# Altium PCB 滤波器.PcbDoc
Units mil, origin at the board's own origin, x right, y up, seen from the top; angles counter-clockwise.
Board outline 6000 x 4000 mil, 2 copper layers (Top Layer, Bottom Layer); 58 components, 33 nets, 221 pads, 0 vias.
Unrouted connection lines stored in the file: 12.
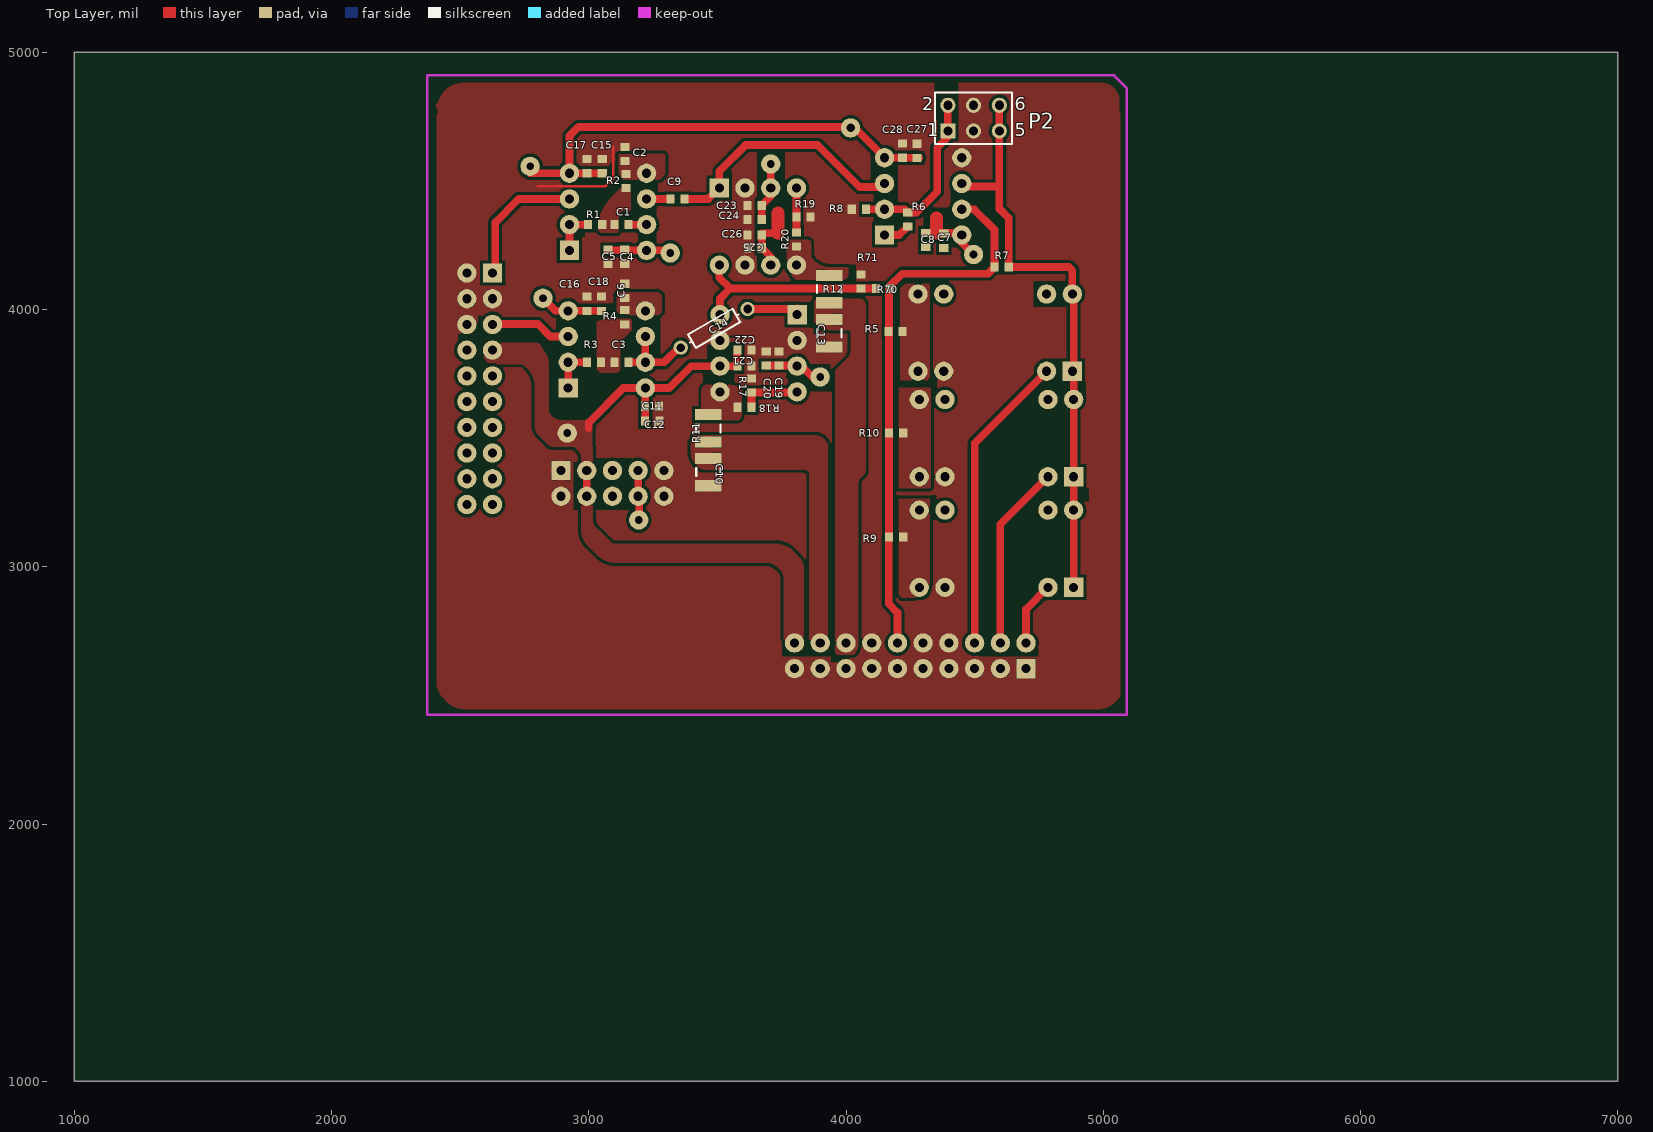
[diagram p0: Top Layer view]
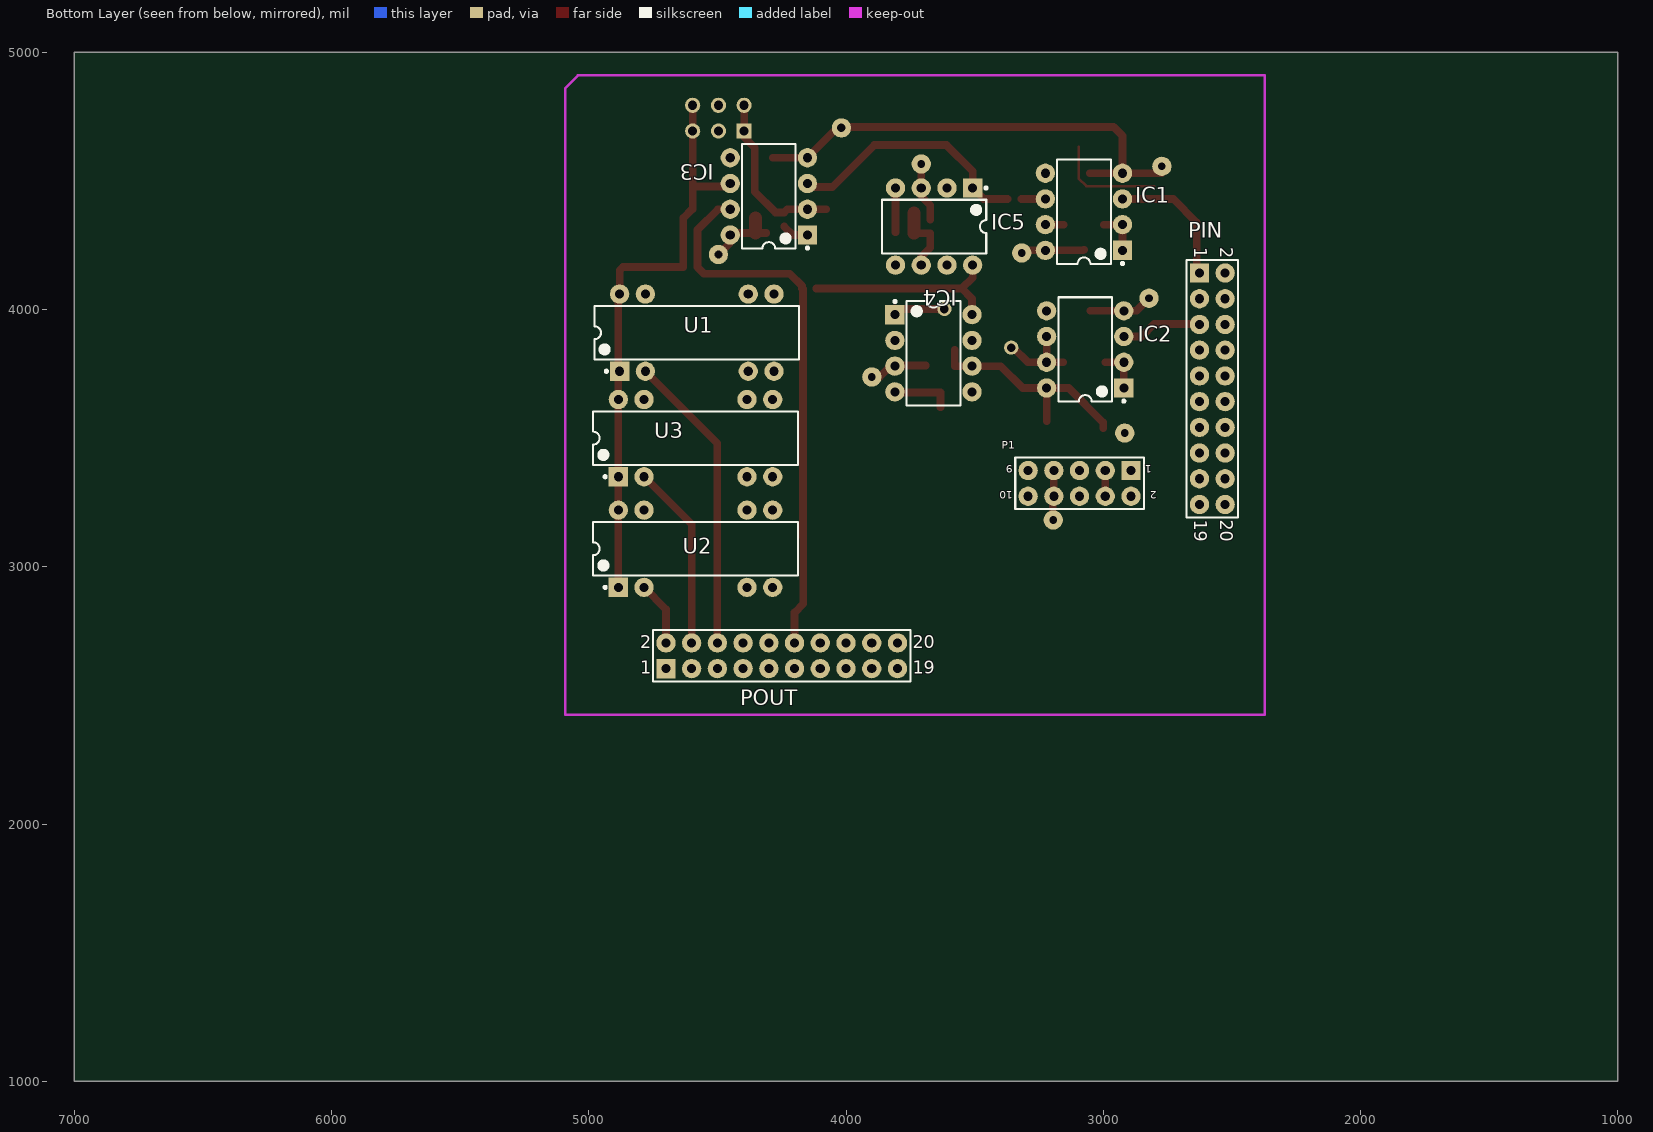
[diagram p1: Bottom Layer view, seen from below]

## Layer stack, top to bottom
Top Solder: solder mask 0.4, Solder Resist, Dk 3.5
Top Layer: signal copper 1.4
Dielectric 1: dielectric 12.6, FR-4, Dk 4.8
Bottom Layer: signal copper 1.4
Bottom Solder: solder mask 0.4, Solder Resist, Dk 3.5

## Board outline
1000,1000 7000,1000 7000,5000 1000,5000

## Design rules (kind name [scope] priority, off if disabled: settings)
Clearance [All] p1: gap=5 ignorepadtopadclearanceinfootprint=FALSE except(0: Arc-Hole Track-Hole SMDPad-Hole THPad-Hole Via-Hole Fill-Hole Poly-Hole Region-Hole Text-Hole; 13: Arc-Fill Arc-Poly Arc-Region Track-Fill Track-Poly Track-Region SMDPad-Fill SMDPad-Poly SMDPad-Region THPad-Fill THPad-Poly THPad-Region Via-Fill Via-Poly Via-Region Fill-Fill Fill-Poly Fill-Region Poly-Poly Poly-Region Region-Region)
PolygonConnect [All] p1: connectstyle=Relief reliefconductorwidth=30 reliefentries=4 polygonreliefangle="90 Angle" airgapwidth=0
RoomDefinition 滤波器 [InComponentClass('滤波器')] p1: confinementstyle=ConfineIn formatcopy=TRUE outline 115,55 12935,55 12935,5840 115,5840
RoutingVias [All] p1: holewidth=28 width=50 viastyle="Through Hole" minholewidth=28 minwidth=50 maxholewidth=28 maxwidth=50
SolderMaskExpansion [All] p1: expansion=4
Width [All] p1: maxlimit=30 minlimit=10 preferedwidth=30 minimp=50.000000 maximp=50.000000 favimp=50.000000
30 further rules are at their usual default settings.

## Components (designator, comment, footprint, x,y, rotation, side; value= is the part's Value field where it differs from the comment)
C1 "Cap" 1608[0603] 3127.28,4330 r0 top value=10n
C2 "Cap" 1608[0603] 3141.25,4605 r270 top value=10n
C3 "Cap" 1608[0603] 3127.56,3795 r0 top value=10n
C4 "Cap" 1608[0603] 3140,4205 r270 top value=10nF
C5 "Cap" 1608[0603] 3075,4205 r270 top value=10uF
C6 "Cap" 1608[0603] 3140,4072.56 r270 top value=10n
C7 "Cap" 1608[0603] 4380,4267.44 r270 top value=10nF
C8 "Cap" 1608[0603] 4310,4270 r270 top value=10uF
C9 "Cap" 1608[0603] 3345,4430 r180 top value=1uF
C10 "Cap" C1210 3465.12,3368 r270 top value=1uF
C11 "Cap" 1608[0603] 3246,3624 r0 top value=10nF
C12 "Cap" 1608[0603] 3246.75,3566 r0 top value=10uF
C13 "Cap" C1210 3935,3908 r270 top value=1uF
C14 "Cap" AXIAL-0.3 3487.59,3926.96 r210 top value=1uF
C15 "Cap" 1608[0603] 3052.44,4557.44 r90 top value=10nF
C16 "Cap" 1608[0603] 2992.44,4022.44 r90 top value=10nF
C17 "Cap" 1608[0603] 2992.44,4557.44 r90 top value=10uF
C18 "Cap" 1608[0603] 3050,4022.44 r90 top value=10uF
C19 "Cap" 1608[0603] 3740,3809.84 r90 top value=10nF
C20 "Cap" 1608[0603] 3690,3809.84 r90 top value=10uF
C21 "Cap" 1608[0603] 3605,3780 r0 top value=10nF
C22 "Cap" 1608[0603] 3605,3843.31 r0 top value=10uF
C23 "Cap" 1608[0603] 3645,4405 r180 top value=10nF
C24 "Cap" 1608[0603] 3645,4350 r180 top value=10uF
C25 "Cap" 1608[0603] 3645,4240 r180 top value=10nF
C26 "Cap" 1608[0603] 3645,4290 r180 top value=10uF
C27 "Cap" 1608[0603] 4276,4616.95 r90 top value=10nF
C28 "Cap" 1608[0603] 4220,4617.44 r90 top value=10uF
IC1 "OPA2188AID" dip-8 3075,4380 r0 bottom
IC2 "OPA2188AID" dip-8 3070,3845 r0 bottom
IC3 "OPA2188AID" dip-8 4300,4440 r0 bottom
IC4 "AD835ARZ" DIP-8 3660,3830 r180 bottom
IC5 "AD835ARZ" DIP-8 3657.56,4322.44 r270 bottom
P1 "Header 5X2" HDR2X5 2892,3374 r0 bottom
P2 "Header 3X2" HDR2X3 4396,4694 r0 top
PIN "Header 10X2" HDR2X10 2626,4142 r270 bottom
POUT "Header 10X2" HDR2X10 4700,2604 r180 bottom
R1 "Res1" 1608[0603] 3024.88,4330 r0 top value=120
R2 "Res1" 1608[0603] 3145,4500 r90 top value=120
R3 "Res1" 1608[0603] 3020,3795 r0 top value=120
R4 "Res1" 1608[0603] 3140,3970 r90 top value=120
R5 "Res1" 1608[0603] 4192.56,3915 r180 top value=70
R6 "Res1" 1608[0603] 4240,4350 r270 top value=45K
R7 "Res1" 1608[0603] 4605,4165 r180 top value=500
R8 "Res1" 1608[0603] 4050,4390 r0 top value=10K
R9 "Res1" 1608[0603] 4195,3115 r180 top value=1
R10 "Res1" 1608[0603] 4195,3520 r180 top value=7
R11 "Res1" C1210 3465.12,3538.15 r270 top value=10K
R12 "Res1" C1210 3935,4079.41 r270 top value=10K
R17 "Res1" 1608[0603] 3632.44,3705 r270 top value=200
R18 "Res1" 1608[0603] 3605,3620 r180 top value=2K
R19 "Res1" 1608[0603] 3835,4360 r180 top value=200
R20 "Res1" 1608[0603] 3807.56,4272.44 r270 top value=2K
R70 "Res1" 1608[0603] 4143.56,4082 r0 top value=80K
R71 "Res1" 1608[0603] 4058,4108.81 r90 top value=20K
U1 "D1A050000" D1A050000 4880,3760 r90 bottom
U2 "D1A050000" D1A050000 4885,2920 r90 bottom
U3 "D1A050000" D1A050000 4885,3350 r90 bottom

## Footprints (in the part's own frame and the unit in brackets; to place one, negate y for a bottom-side part, rotate by r counter-clockwise, add the part's x,y. Pads: shape width x height; smd on the part's side, far side on the other; paste and mask are expansions set on the pad)
1608[0603] [mm] "Chip Capacitor, Body 1.6x0.8mm, IPC High Density"
  rect 0.8x0.9 smd: 1(-0.7,0) 2(0.7,0)
  body extent -0.87,-0.48 0.87,0.48, height 1.3
AXIAL-0.3 [mm] "Axial Device, Thru-Hole; 2 Leads; 0.3 in Pin Spacing"
  round 1.4 hole 0.85: 1(-3.81,0) 2(3.81,0)
  silkscreen extent -2.77,-0.76 2.77,0.76
C1210 [mm] "Chip Capacitor, Body 3.2x2.5mm, IPC High Density"
  rect 1.1x2.6 smd: 1(-1.35,0) 2(1.35,0)
  silkscreen extent -0.4,-1.2 0.4,1.2, body extent -1.7,-1.35 1.7,1.35, height 1.3
D1A050000 [mm]
  rect 1.905x1.905 hole 0.9: 1(0,0)
  round 1.905 hole 0.9: 2(0,-2.54) 6(0,-12.7) 7(0,-15.24) 8(7.62,-15.24) 9(7.62,-12.7) 13(7.62,-2.54) 14(7.62,0)
  silkscreen extent -0.12,-17.72 6.46,2.48, body extent 0.21,-17.72 7.41,2.48, height 5.08
dip-8 [mm] "DIP; 8 Leads; Row Spacing 7.62 mm; Pitch 2.54 mm"
  rect 1.905x1.905 hole 0.9: 1(-3.81,3.81)
  round 1.905 hole 0.9: 2(-3.81,1.27) 3(-3.81,-1.27) 4(-3.81,-3.81) 5(3.81,-3.81) 6(3.81,-1.27) 7(3.81,1.27) 8(3.81,3.81)
  silkscreen extent -3.93,-5.15 2.65,5.23, body extent -3.6,-5.15 3.6,5.15, height 5.08
DIP-8 [mm] "DIP; 8 Leads; Row Spacing 7.62 mm; Pitch 2.54 mm"
  rect 1.905x1.905 hole 0.9: 1(-3.81,3.81)
  round 1.905 hole 0.9: 2(-3.81,1.27) 3(-3.81,-1.27) 4(-3.81,-3.81) 5(3.81,-3.81) 6(3.81,-1.27) 7(3.81,1.27) 8(3.81,3.81)
  silkscreen extent -3.94,-5.15 2.65,5.23, body extent -3.6,-5.15 3.6,5.15, height 5.08
HDR2X3 [mm] "Connector; Header; 3x2 Position"
  rect 1.5x1.5 hole 0.9: 1(0,0)
  round 1.5 hole 0.9: 2(0,2.54) 3(2.54,0) 4(2.54,2.54) 5(5.08,0) 6(5.08,2.54)
  silkscreen extent -1.27,-1.27 6.35,3.81
HDR2X5 [mm] "Connector; Header; 5x2 Position"
  rect 1.905x1.905 hole 0.9: 1(0,0)
  round 1.905 hole 0.9: 2(0,2.54) 3(2.54,0) 4(2.54,2.54) 5(5.08,0) 6(5.08,2.54) 7(7.62,0) 8(7.62,2.54) 9(10.16,0) 10(10.16,2.54)
  silkscreen extent -1.27,-1.27 11.43,3.81
HDR2X10 [mm] "Connector; Header; 10x2 Position"
  rect 1.905x1.905 hole 0.9: 1(0,0)
  round 1.905 hole 0.9: 2(0,2.54) 3(2.54,0) 4(2.54,2.54) 5(5.08,0) 6(5.08,2.54) 7(7.62,0) 8(7.62,2.54) 9(10.16,0) 10(10.16,2.54) 11(12.7,0) 12(12.7,2.54) 13(15.24,0) 14(15.24,2.54) 15(17.78,0) 16(17.78,2.54) 17(20.32,0) 18(20.32,2.54) 19(22.86,0) 20(22.86,2.54)
  silkscreen extent -1.27,-1.27 24.13,3.81

## Part data
C1 C2 C3 C4 C5 C6 C7 C8 C9 C10 C11 C12 C13 C14 C15 C16 C17 C18 C19 C20 C21 C22 C23 C24 C25 C26 C27 C28: "Capacitor", LatestRevisionDate=17-Jul-2002, LatestRevisionNote="Re-released for DXP Platform.", PackageDescription="Radial Cap, Thru-Hole; 2 Leads; 0.3 in Pin Spacing", PackageReference=RAD-0.3, Published=8-Jun-2000, Publisher="Altium Limited"
IC1 IC2 IC3: "Integrated Circuit", Manufacturer_Name="Texas Instruments", Mouser Part Number=595-OPA2188AID, RS Part Number=8122568P, Datasheet Link=http://www.ti.com/lit/ds/symlink/opa2188.pdf, Height=1.75mm, Manufacturer_Part_Number=OPA2188AID, Mouser Price/Stock=https://www.mouser.com/Search/Refine.aspx?Keyword=595-OPA2188AID, RS Price/Stock=http://uk.rs-online.com/web/p/products/8122568P
IC4 IC5: "Integrated Circuit", Manufacturer_Name="Analog Devices", Mouser Part Number=584-AD835ARZ, RS Part Number=5236973, Datasheet Link=http://www.analog.com/static/imported-files/data_sheets/AD835.pdf, Height=1.75mm, Manufacturer_Part_Number=AD835ARZ, Mouser Price/Stock=https://www.mouser.com/Search/Refine.aspx?Keyword=584-AD835ARZ, RS Price/Stock=https://uk.rs-online.com/web/p/products/5236973
P1: "Header, 5-Pin, Dual row", LatestRevisionDate=17-Jul-2002, LatestRevisionNote="Re-released for DXP Platform.", Publisher="Altium Limited"
P2: "Header, 3-Pin, Dual row", LatestRevisionDate=17-Jul-2002, LatestRevisionNote="Re-released for DXP Platform.", Publisher="Altium Limited"
PIN POUT: "Header, 10-Pin, Dual row", LatestRevisionDate=17-Jul-2002, LatestRevisionNote="Re-released for DXP Platform.", Publisher="Altium Limited"
R1 R2 R3 R4 R5 R6 R7 R8 R9 R10 R11 R12 R17 R18 R19 R20 R70 R71: "Resistor", LatestRevisionDate=17-Jul-2002, LatestRevisionNote="Re-released for DXP Platform.", PackageDescription="Axial Device, Thru-Hole; 2 Leads; 0.3 in Pin Spacing", PackageReference=AXIAL-0.3, Published=8-Jun-2000, Publisher="Altium Limited"

## Free pads (board coordinates)
  round 75 hole 30: 2(2772,4556.75) 3(2821.8,4044) 4(4496,4214) 5(3316.67,4220) 6(3707.56,4566.02) 7(3899.35,3738) 9(3194.21,3182) 10(2916.54,3519.67)
  round 75 hole 33.46: 11(4017.8,4706)

## Nets (pads, with @x,y where several pads share a name; then routed paths per layer and width w, separated by ;. In a path a pad name is that pad's centre, name@x,y a point inside that pad or via, vN(x,y) a via of type N, cw(c..) or ccw(c..) an arc to the next point about the centre after c; other vN are vias at no path point)
+5: C4.1 C5.1 C7.1 C8.1 C11.1 C12.1 C21.1 C22.1 C25.1 C26.1 IC1.8 IC2.8 IC3.8 IC4.6 IC5.6 P1.3 P1.4 pad.4 pad.5 pad.10 PIN.7 POUT.20 | length 1812.8
  Top Layer w30: P1.4 P1.3 ; 3000,3538.58 3000,3560.54 3134.46,3695 IC2.8 ; C5.1 3077.56,4230 IC1.8 3316.67,4230 pad.5 ; C12.1 3220,3566.81 IC2.8 ; C22.1 C21.1 IC4.6 3398,3780 3313,3695 IC2.8 ; IC5.6 3707.56,4205 C25.1 C26.1 3672.56,4296.32 3736,4296.32 ; C8.1 4352,4297.56 4442.44,4297.56 IC3.8 4450,4260 pad.4
  Top Layer w50: 3736,4296.32 3736,4375 ; 4352,4297.56 4352,4356
+IN1_A: IC1.3 PIN.1 | length 527.2
  Top Layer w30: PIN.1 2636,4152 2636,4338 2728,4430 IC1.3
+IN1_B: C2.2 IC1.5 R2.2
+IN2_A: IC2.3 PIN.5 | length 315.1
  Top Layer w30: PIN.5 2628,3944 2802,3944 2851,3895 IC2.3
+IN2_B: C6.2 IC2.5 R4.2
+IN3_A: C9.1 IC3.3 IC5.1 | length 975.6
  Top Layer w30: C9.1 3465.12,4430 IC5.1 3507.56,4537.42 3609.34,4639.2 3890.28,4639.2 4053.48,4476 4136,4476 IC3.3
+IN3_B: C2.1 C4.2 C5.2 C6.1 C10.2 C11.2 C12.2 C13.2 C15.2 C16.2 C17.2 C18.2 C19.2 C20.2 C21.2 C22.2 C23.2 C24.2 C25.2 C26.2 C27.2 C28.2 IC3.5 IC4.2 IC4.7 IC5.2 IC5.7 P1.1 P1.2 P1.9 P1.10 P2.3 P2.4 PIN.2 PIN.3 PIN.4 PIN.6 POUT.1 POUT.3 POUT.5 POUT.7 POUT.8 POUT.9 POUT.10 POUT.11 POUT.13 POUT.14 POUT.15 POUT.17 POUT.19 R8.1 R17.1 R19.1 R71.2 U1.6 U2.6 U3.6 | length 428.9
  Top Layer w10: 2801.37,4480 3065.82,4480 3096,4510.18 3096,4632
-5: C15.1 C16.1 C17.1 C18.1 C19.1 C20.1 C23.1 C24.1 C27.1 C28.1 IC1.4 IC2.4 IC3.4 IC4.3 IC5.3 P1.7 P1.8 pad.2 pad.3 pad.6 pad.7 pad.9 pad.11 | length 2781.3
  Top Layer w30: pad.2 2772,4530 IC1.4 ; pad.3 2870.8,3995 IC2.4 2920.12,3994.88 C16.1 C18.1 ; C15.1 3052.32,4530 IC1.4 ; P1.7 P1.8 3198,3274 pad.9 ; C24.1 C23.1 3707.56,4440 IC5.3 pad.6 ; C20.1 C19.1 3824.78,3782.28 3869.06,3738 pad.7 ; C27.1@4285,4589.88 4284.88,4590 IC3.4 4030,4710 2960,4710 2925,4675 IC1.4
-IN1_A: IC1.1 IC1.2 R1.1 | length 172.3
  Top Layer w30: IC1.1 IC1.2 R1.1
-IN1_B: C1.2 C9.2 IC1.6 IC1.7 | length 162.6
  Top Layer w30: C1.2 IC1.7 ; IC1.6 C9.2
-IN2_A: IC2.1 IC2.2 R3.1 | length 172.4
  Top Layer w30: IC2.1 IC2.2 R3.1
-IN2_B: C3.2 C14.2 IC2.6 IC2.7 | length 326.6
  Top Layer w30: C3.2 IC2.7 ; IC2.6 IC2.7 ; C14.2 3349.56,3851.96 3292.3,3794.71 3220,3794.71 IC2.7
-IN3_A: IC3.2 P2.1 P2.2 R6.1 R8.2 | length 668.6
  Top Layer w30: R8.2 4227.56,4390 R6.1 4274.09,4377.56 4354.53,4458 4354.53,4628.64 4396,4670.11 P2.1 P2.2
-IN3_B: IC3.6 P2.5 P2.6 R7.1 U1.1 U1.14 U2.1 U2.14 U3.1 U3.14 | length 2292.7
  Top Layer w30: IC3.6 4450,4478 4596,4478 ; P2.6 P2.5 4596,4478 ; U2.1 U2.14 U3.1 U3.14 4885,4060 U1.14 4880,4152 4867,4165 R7.1 4632.56,4355.46 4597.3,4390.72 4596,4390.72 4596,4478
NetC1_1: C1.1 R1.2 R2.1
NetC3_1: C3.1 R3.2 R4.1
NetC7_2: C7.2 C8.2
NetIC4_4: IC4.4 R17.2 R18.1 | length 237.6
  Top Layer w30: R18.1 3632.44,3620.12 R17.2 3810,3677.44 IC4.4
NetIC5_4: IC5.4 R19.2 R20.1 | length 172.5
  Top Layer w30: R20.1 3807.56,4359.88 R19.2 3807.44,4472.32 IC5.4
NetR5_1: R5.1 U1.7 U1.8
NetR9_1: R9.1 U2.7 U2.8
NetR10_1: R10.1 U3.7 U3.8
OUT1: IC4.5 R11.1 R18.2
OUT2: IC5.5 R12.1 R20.2
OUT3_A: IC3.1 R6.2 | length 103.4
  Top Layer w30: IC3.1 4207.56,4290 R6.2
OUT3_B: IC3.7 POUT.12 R5.2 R7.2 R9.2 R10.2 R70.2 | length 2146.9
  Top Layer w30: 3507.56,3982.44 3510,3980 ; R70.2@4167.44,4080 R10.2 R9.2 4166,3115 4166,2856 4200,2822 POUT.12 ; R70.2 4171.12,4091.8 4218.76,4139.44 4551.88,4139.44 R7.2 4577.44,4309.84 4497.28,4390 IC3.7
OUT33_B: IC4.8 IC5.8 R70.1 R71.1 | length 751.7
  Top Layer w30: IC5.8 3507.56,4124.08 3549.64,4082 ; 3510,4021 3510,4042.36 3549.64,4082 ; R70.1 3549.64,4082
PIN1: POUT.2 U2.2 | length 251.2
  Top Layer w30: POUT.2 4700,2835 U2.2
PIN7: POUT.4 U3.2 | length 722.6
  Top Layer w30: POUT.4 4600,3165 U3.2
PIN70: POUT.6 U1.2 | length 1172
  Top Layer w30: POUT.6 4500,3480 U1.2
VPIN1: C10.1 POUT.18 R11.2
VPIN2: C13.1 POUT.16 R12.2
X1: C14.1 IC4.1 | length 226.1
  Top Layer w30: C14.1 3788.04,4001.96 IC4.1 IC4.1@3810,4004.5
pads on no net: P1.5 P1.6 PIN.8 PIN.9 PIN.10 PIN.11 PIN.12 PIN.13 PIN.14 PIN.15 PIN.16 PIN.17 PIN.18 PIN.19 PIN.20 U1.9 U1.13 U2.9 U2.13 U3.9 U3.13

## Polygon pours and split planes (outlines as drawn)
+IN3_B on Top Layer (solid, pour order 72): 2413.41,4778 2413.41,4782 cw(c2513.41,4782) 2513.41,4882 4990.59,4882 cw(c4990.59,4810) 5062.59,4810 5062.59,4777.41 ccw(c5070,4777.41) 5070,4770 2420.22,4770 cw(c2420.22,4780.75) 2409.47,4780.75
+IN3_B on Top Layer (solid, remove dead copper, pour order 70): 2414.82,4766 2412,4764 ccw(c2409.59,4765) 2412,4766 2410,4766 2410,2550 ccw(c2496.91,2550) 2435.46,2488.54 2448.71,2475.29 ccw(c2519.42,2546) 2519.42,2446 4982,2446 ccw(c4982,2528.08) 5040.04,2470.04 5060,2490 ccw(c5045.52,2504.48) 5066,2504.49 5066,4751.23 ccw(c4977.24,4751.23) 5040,4814 ccw(c4972.4,4746.41) 4972.4,4842 2474,4842 ccw(c2473.99,4788.91) 2436.44,4826.44 2410,4800 ccw(c2419.65,4790.34) 2412,4779.04 2412,4765.36
VPIN2 on Top Layer (solid, pour order 58): 4018,3920 3942.67,3920 cw(c3942.67,4011.46) 3878,3946.79 cw(c3882.83,3951.62) 3876,3951.62 3876,4026.26 cw(c3897.1,4026.26) 3882.18,4041.18 3886,4045 ccw(c3893.24,4052.24) 3893.24,4042 4050.69,4042 cw(c4050.69,4014.69) 4070,4034 cw(c4055.52,4019.52) 4076,4019.51 4076,3374 cw(c4051.87,3374) 4068.93,3356.93 4054,3342 ccw(c4068.48,3327.52) 4048,3327.51 4048,2698.63 cw(c3993.39,2698.62) 4032,2660 cw(c4027.18,2664.8) 4027.17,2658 3972.49,2658 cw(c3972.48,2678.48) 3958,2664 3958,3764 4006,3812 ccw(c3977.03,3840.97) 4018,3840.97
+5 on Top Layer (solid, pour order 66): 2798.35,3870 2815.26,3853.08 cw(c2746.17,3784) 2843.87,3784 2843.87,3612.45 ccw(c2878.45,3612.45) 2854,3588 ccw(c2897.46,3631.46) 2897.46,3570 3004,3570 cw(c3004,3559.97) 3014.03,3559.95 3013.84,3450 3005.07,3450 cw(c3005.07,3510.91) 2962,3467.84 2948.99,3480.85 ccw(c2878.28,3410.15) 2878.28,3510.14 2843.87,3510.14 cw(c2843.87,3524.67) 2833.6,3514.4 2810,3538 cw(c2838.14,3566.14) 2798.35,3566.14
+5 on Top Layer (solid, pour order 64): 2584,3866 2584,3849.11 ccw(c2659.11,3849.11) 2606,3796 ccw(c2625.31,3815.31) 2625.31,3788 2736,3788 cw(c2736,3768.7) 2749.66,3782.34 2762,3770 cw(c2694.41,3702.4) 2790,3702.4 2790,3550 ccw(c2847.94,3550) 2806.97,3509.03 2842,3474 ccw(c2859.12,3491.12) 2859.12,3466.91 2934,3466.91 cw(c2934.01,3444.97) 2949.52,3460.48 2958,3452 cw(c2929.04,3423.03) 2970,3423.03 2970,3146 ccw(c3061.74,3146) 2996.87,3081.13 3032.71,3045.29 ccw(c3103.42,3116) 3103.42,3016 3686,3016 cw(c3686.01,2943.59) 3737.21,2994.79 3742,2990 cw(c3703.39,2951.38) 3758,2951.37 3758,2710.26 ccw(c3821.39,2710.26) 3776.57,2665.43 3778,2664 ccw(c3792.49,2678.49) 3792.49,2658 3824,2658 ccw(c3824,2672.49) 3834.24,2662.24 3836,2664 3836,2992 ccw(c3768.42,2992.01) 3816.2,3039.8 3795.29,3060.71 ccw(c3724.59,2990.02) 3724.58,3090 3099.72,3090 cw(c3099.72,3108.65) 3086.54,3095.46 3026,3156 cw(c3050.15,3180.14) 3016,3180.14 3016,3456 ccw(c2938.76,3456.01) 2993.37,3510.63 2975.29,3528.71 ccw(c2904.59,3458.02) 2904.58,3558 2850,3558 cw(c2850,3567.66) 2843.17,3560.83 cw(c2889.46,3607.11) 2824,3607.11 2824,3827.37 ccw(c2769.39,3827.38) 2808,3866 ccw(c2798.36,3856.38) 2798.34,3870 2582,3870
VPIN1 on Top Layer (solid, pour order 60): 3396,3449.94 ccw(c3477.94,3449.94) 3420,3392 ccw(c3453.8,3425.8) 3453.8,3378 3832,3378 cw(c3832,3345.76) 3854.8,3368.56 3855.35,3368 cw(c3848.97,3361.61) 3858,3361.61 3858,2718 ccw(c3919.97,2718) 3876.15,2674.18 3890,2660.33 3924,2660.33 ccw(c3924,2670.79) 3931.39,2663.39 3938,2670 cw(c3957.31,2689.31) 3930,2689.31 3930,3462.2 ccw(c3882.2,3462.2) 3916,3496 ccw(c3877.37,3457.37) 3877.37,3512 3406,3512 3406,3510.14 cw(c3371.86,3510.14) 3396,3486
OUT1 on Top Layer (solid, pour order 56): 3465.31,3570 cw(c3465.31,3597.31) 3446,3578 cw(c3465.31,3597.31) 3438,3597.31 3438,3682.69 cw(c3465.31,3682.69) 3446,3702 cw(c3460.49,3687.51) 3460.49,3708 3544.17,3708 cw(c3544.17,3634.71) 3596,3686.53 ccw(c3600.83,3681.7) 3594,3681.7 3594,3591.31 cw(c3566.69,3591.31) 3586,3572 cw(c3581.17,3576.83) 3581.17,3570
OUT2 on Top Layer (solid, pour order 52): 3770,4256 3770,4191.42 ccw(c3870,4191.42) 3799.29,4120.71 3802,4118 ccw(c3806.83,4122.83) 3806.83,4116 3988,4116 ccw(c3988,4135.31) 4001.66,4121.66 4006,4126 ccw(c4001.17,4130.83) 4008,4130.83 4008,4164 3941.6,4164 cw(c3941.6,4259.6) 3874,4192 cw(c3898.14,4216.14) 3864,4216.14 3864,4261.17 ccw(c3857.17,4261.17) 3862,4266 ccw(c3847.51,4251.51) 3847.51,4272 3782,4272 cw(c3772.34,4272) 3779.17,4265.17
NetC3_1 on Top Layer (solid, pour order 50): 3029.72,3840 3029.72,3781.66 ccw(c3063.18,3781.66) 3039.52,3758 ccw(c3049.18,3767.66) 3049.18,3754 3107.48,3754 ccw(c3107.48,3763.37) 3114.11,3756.74 3121.36,3764 ccw(c3119.14,3766.23) 3122.28,3766.23 3122.28,3886 ccw(c3122.28,3914.29) 3142.28,3894.28 3168,3920 3168,3954 ccw(c3158.34,3954) 3165.17,3960.83 3162,3964 3068.35,3964 ccw(c3068.35,3909.37) 3029.72,3948 cw(c3027.66,3945.94) 3030.57,3945.94 3030.57,3778
+IN2_B on Top Layer (solid, pour order 48): 3108,4006 ccw(c3137.77,4006) 3116.72,3984.95 3119.67,3982 ccw(c3129.32,3991.66) 3129.32,3978 3264,3978 ccw(c3264,3997.31) 3277.66,3983.66 3284,3990 3284,4051.1 ccw(c3271.41,4051.1) 3280.31,4060 ccw(c3261,4040.69) 3261,4068 3119.64,4068 ccw(c3119.64,4064.04) 3116.84,4066.84 3106,4056 cw(c3101.17,4051.17) 3108,4051.17
NetC1_1 on Top Layer (solid, pour order 46): 3052.44,4297.56 cw(c3052.44,4312.04) 3042.2,4301.8 3030,4314 cw(c3034.83,4318.83) 3028,4318.83 cw(c3297.38,4256.16) 3137.73,4482 3163.07,4482 3163.07,4386 3149.99,4386 ccw(c3149.99,4338.22) 3116.19,4372 3116.19,4308.12 cw(c3101.89,4308.12) 3112,4298 3050,4298
+IN1_B on Top Layer (solid, pour order 44): 3116,4594 3116,4539.8 ccw(c3163.8,4539.8) 3130,4506 ccw(c3134.83,4510.83) 3134.83,4504 3268,4504 ccw(c3268,4523.31) 3281.66,4509.66 3290,4518 ccw(c3270.69,4537.31) 3298,4537.31 3298,4594.34 ccw(c3284.34,4594.34) 3294,4604 ccw(c3289.17,4599.17) 3289.17,4606 3122.28,4606 ccw(c3122.28,4600.49) 3118.39,4604.39 3114,4600 cw(c3112.25,4598.25) 3114.72,4598.25 3114.72,4589.88
no net on Top Layer (solid, pour order 40): 3120,4516
NetR9_1 on Top Layer (solid, pour order 16): 4205,3265 4205,2891.81 4216.81,2880 4326,2880 4326,3265
NetR10_1 on Top Layer (solid, pour order 14): 4210,3685 4205,3680 4205,3305 4325,3305 4330,3311 4330,3340 4330,3695 4210,3695 4205,3695 4205,3675
NetR5_1 on Top Layer (solid, remove dead copper, pour order 12): 4210,3725 4315,3725 4325,3735 4325,4100 4230,4100 4215,4085 4210,4085

## Keep-outs
Keep-Out Layer:
  lines w10: 2372,2424 5092,2424 5092,4736 5092,4778 5092,4790 5092,4860 5042,4910 2372,4910 2372,2424

## Other copper
Top Layer:
  pour cut-out: 4343.98,4886 4343.98,4842 4436.53,4842 cw(c4436.53,4840) 4438.53,4840 4438.53,4880.53 cw(c4442,4880.53) 4442,4884 4346,4884
  pour cut-out: 4300,4398.27 4300,4328.75 4396,4328.75 4396,4398 4302,4398
  pour cut-out: 4348,4842 4348,4736.89 4438.53,4736.89 4438.53,4840 4346,4840
  pour cut-out: 3654,4518.22 3654,4436.42 3677.75,4436.42 3677.75,4518.22
  pour cut-out: 3860.02,3786.98 3860.02,3774 3940.35,3774 3940.35,3790 3863.38,3790
  pour cut-out: 2870.8,3922 2900.54,3922 2900.54,3968.46 2870.8,3968.46
  pour cut-out: 3080.72,3977.25 3096,3977.25 3096,4024.95 3080.72,4024.95
  pour cut-out: 3940,2650 3940,2628 3990,2628 3990,2639.75 3954,2639.75 3954,2650.26 3930.4,2650.26 3930.4,2650
  pour cut-out: 3855.73,3701.57 3855.73,3680 3942,3680 3942,3705.99 3863.33,3705.99 3863.33,3701.98
  pour cut-out: 3872.57,3926.5 3872.57,3902 3893.19,3902 3893.19,3926.5
  pour cut-out: 3862,3940.64 3862,3926.5 3876.74,3926.5 3876.74,3940.64
  pour cut-out: 3735.8,4610.96 3735.8,4490.23 3764,4490.23 3764,4610.96
  pour cut-out: 3660.17,4607.49 3654,4607.49 3654,4518.22 3682,4518.22 3682,4610.96 3656,4610.96
  pour cut-out: 3538.34,4522.94 3558.06,4522.94 3558.06,4540 3542.09,4540 3542.09,4541.57 3538.34,4541.57
  pour cut-out: 2953.42,4296 2953.42,4280.5 2987.3,4280.5 2987.3,4301 2958,4301 2958,4298.36
  pour cut-out: 2568,3908 2581.89,3908 2581.89,3978.02 2568,3978.02
  pour cut-out: 4010,4175.29 4011.99,4175.29 4011.99,4108 4040,4108 4040,4176.25 4013.07,4176.25
  pour cut-out: 3236,3955.18 3240,3955.18 3240,3821.39 3280.31,3821.39 3280.31,3964.75 3243.41,3964.75
  pour cut-out: 4518,2650.63 4749.2,2650.63 4749.2,2682 4518,2682
  pour cut-out: 3654,4206.82 3654,4146.97 3668.34,4146.97 3668.34,4211.13 3652,4211.13
  pour cut-out: 3266.98,4401.76 3263.69,4401.76 3263.69,4266.96 3190.62,4266.96 3190.62,4385.77 3266.98,4385.77
  pour cut-out: 3269.9,4490.75 3269.9,4458.24 3242.79,4458.24 3242.79,4482.71 3252.76,4482.71 3252.76,4491.74 3266,4491.74
  pour cut-out: 3773.98,3743.98 3773.98,3710.68 3857.22,3710.68 3857.22,3744.47 3766.65,3744.47 3766.65,3724.11 3766,3724.11
  pour cut-out: 3542.76,3898.91 3542.76,3899.3 3618,3899.3 3618,3889.79 3539.62,3889.79 3539.62,3900
  pour cut-out: 3546.53,3870.21 3546.53,3865 3459.06,3865 3459.06,3809.24 3551.25,3809.24 3551.25,3869.14
  pour cut-out: 3443.42,3750 3443.42,3717.19 3568.14,3717.19 3568.14,3747.71 3456,3747.71 3456,3751.76
  pour cut-out: 2878.02,3866.76 2878.02,3745.5 2904,3745.5 2904,3864.77 2883.98,3864.77 2883.98,3867.72
  pour cut-out: 2651.47,3897.89 2651.47,3882.83 2672,3882.83 2672,3915.76 2652,3915.76 2652,3892.94
  pour cut-out: 2584,3902 2584,3906 2489.98,3906 2489.98,3850.89 2608.72,3850.89 2608.72,3910 2589.98,3910 2589.98,3905.98
  pour cut-out: 2939.74,3405.72 2939.74,3220 2965.16,3220 2965.16,3409.15 2941.06,3409.15 2941.06,3406.72
  pour cut-out: 3026.95,3416 3031.62,3416 3031.62,3392.91 3166,3392.91 3166,3424 3028.08,3424 3028.08,3414
  pour cut-out: 3029.24,3239.58 3029.24,3220 3170,3220 3170,3258 3032.56,3258 3032.56,3240.45 3034,3240.45
  pour cut-out: 3750.8,2690.82 3750.8,2650.63 3981.09,2650.63 3981.09,2644.75 3954,2644.75 3954,2690.82 3755.89,2690.82 3755.89,2678.53
  pour cut-out: 4778,2866.75 4778,2869.5 4834.5,2869.5 4834.5,2898 4775.28,2898 4775.28,2870.34
  pour cut-out: 4335.37,3274.37 4335.37,3180 4352.24,3180 4352.24,3277.4 4331.07,3277.4 4331.07,3277.25
  pour cut-out: 4907.28,3300 4907.28,3252.76 4946,3252.76 4946,3304.27 4913.24,3304.27 4913.24,3299.5
  pour cut-out: 4913.24,3716 4913.24,3668 4934.2,3668 4934.2,3722 4914,3722 4914,3718
  pour cut-out: 4793.18,3810.5 4850,3810.5 4850,3786 4793.18,3786
  pour cut-out: 4315,3725 4320,3725 4320,3690.65 4354.53,3690.65 4354.53,3754.53 4315,3754.53
  pour cut-out: 4728,4112 4728,4008 4851.76,4008 4851.76,4112
  pour cut-out: 4405.89,4464.53 4405.89,4239.88 4495.24,4239.88 4495.24,4260.63 4512,4260.63 4512,4466 4398,4466
  pour cut-out: 4094,4604 4094,4503.18 4170,4503.18 4170,4456.03 4105.89,4456.03 4105.89,4340.5 4202.28,4340.5 4202.28,4605.48 4098,4605.48 4098,4607.49
Bottom Layer:
  pour cut-out: 2508.21,3814.98 2508.21,3485.56 2410,3485.56

## Text inside footprints (layer, text, board x,y; h text height)
P1: Bottom Overlay "10" at 3352,3294 h30 r180; Bottom Overlay "9" at 3352,3394 h30 r180; Bottom Overlay "1" at 2812,3394 h30 r180; Bottom Overlay "2" at 2792,3294 h30 r180
P2: Top Overlay "6" at 4656,4774 h50; Top Overlay "5" at 4656,4674 h50; Top Overlay "2" at 4296,4774 h50; Top Overlay "1" at 4316,4674 h50
PIN: Bottom Overlay "20" at 2546,3182 h50 r90; Bottom Overlay "19" at 2646,3182 h50 r90; Bottom Overlay "1" at 2646,4242 h50 r90; Bottom Overlay "2" at 2546,4242 h50 r90
POUT: Bottom Overlay "20" at 3740,2684 h50; Bottom Overlay "19" at 3740,2584 h50; Bottom Overlay "1" at 4800,2584 h50; Bottom Overlay "2" at 4800,2684 h50